# EAGLE board shd_v2.0_double_neu (EAGLE 9.5.2)
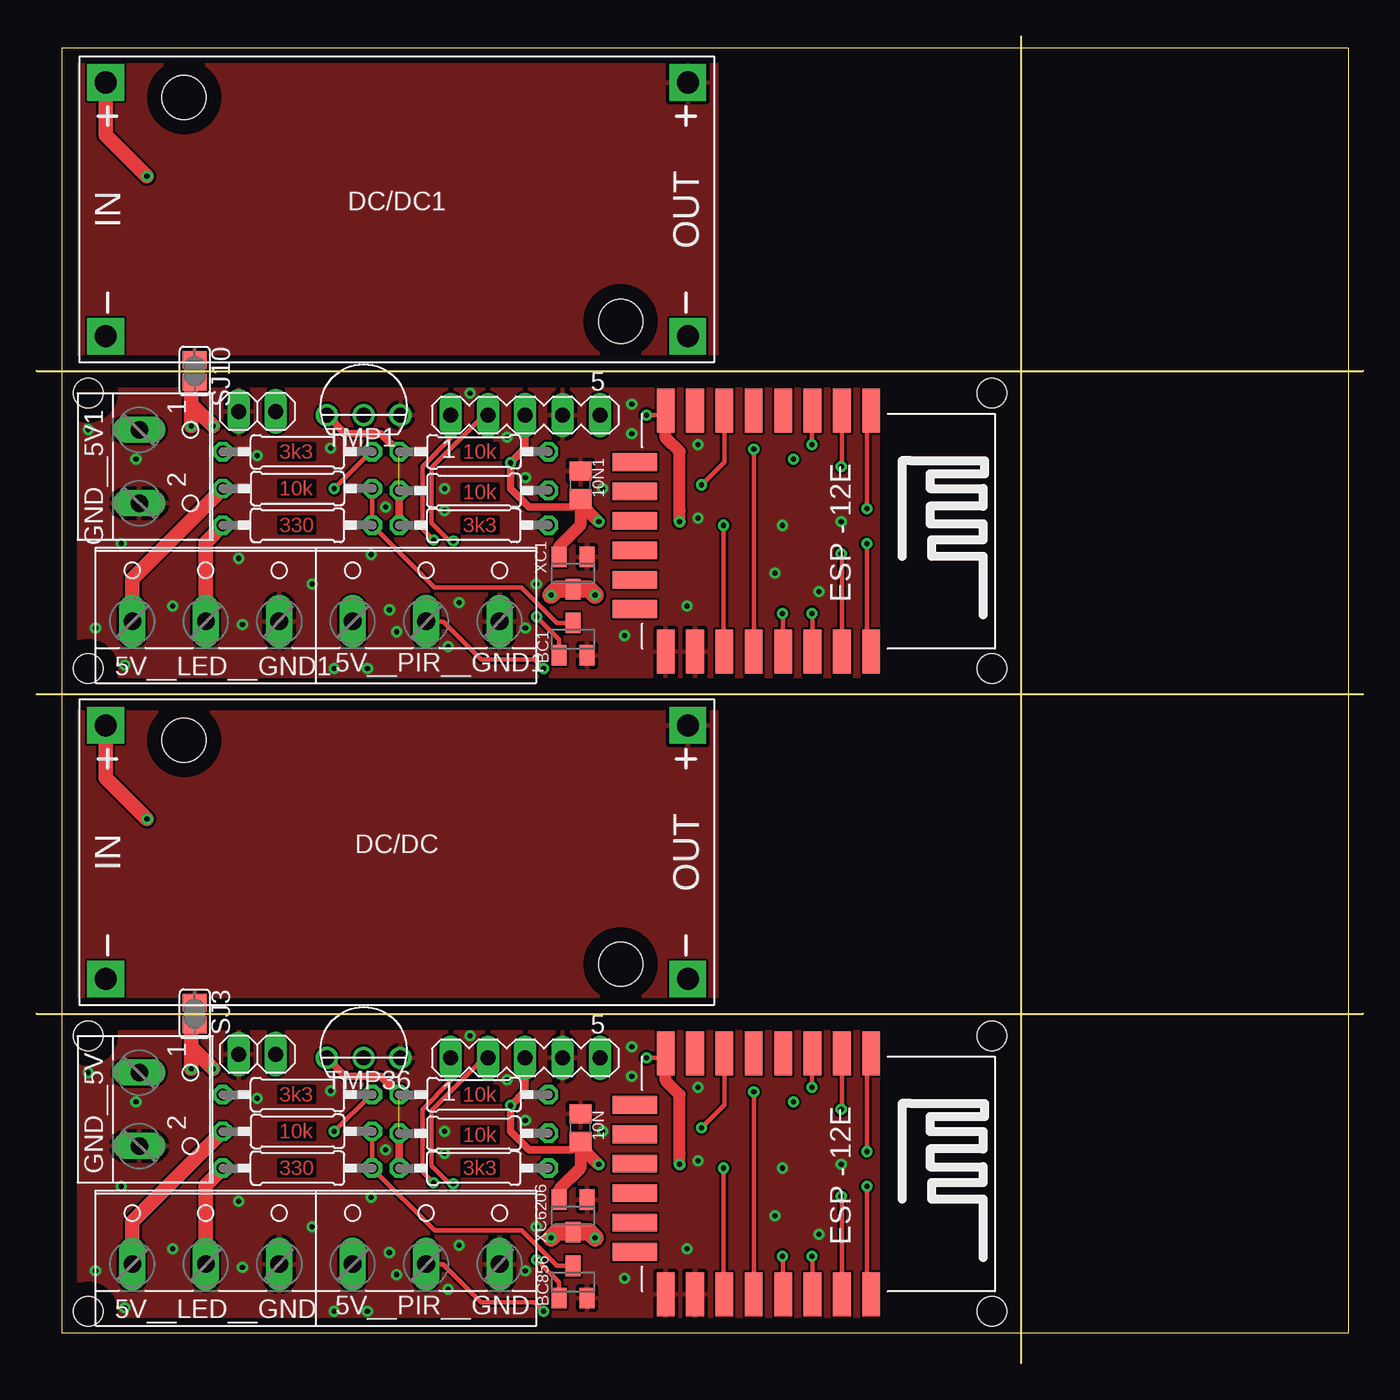
[diagram p0: board, top side]
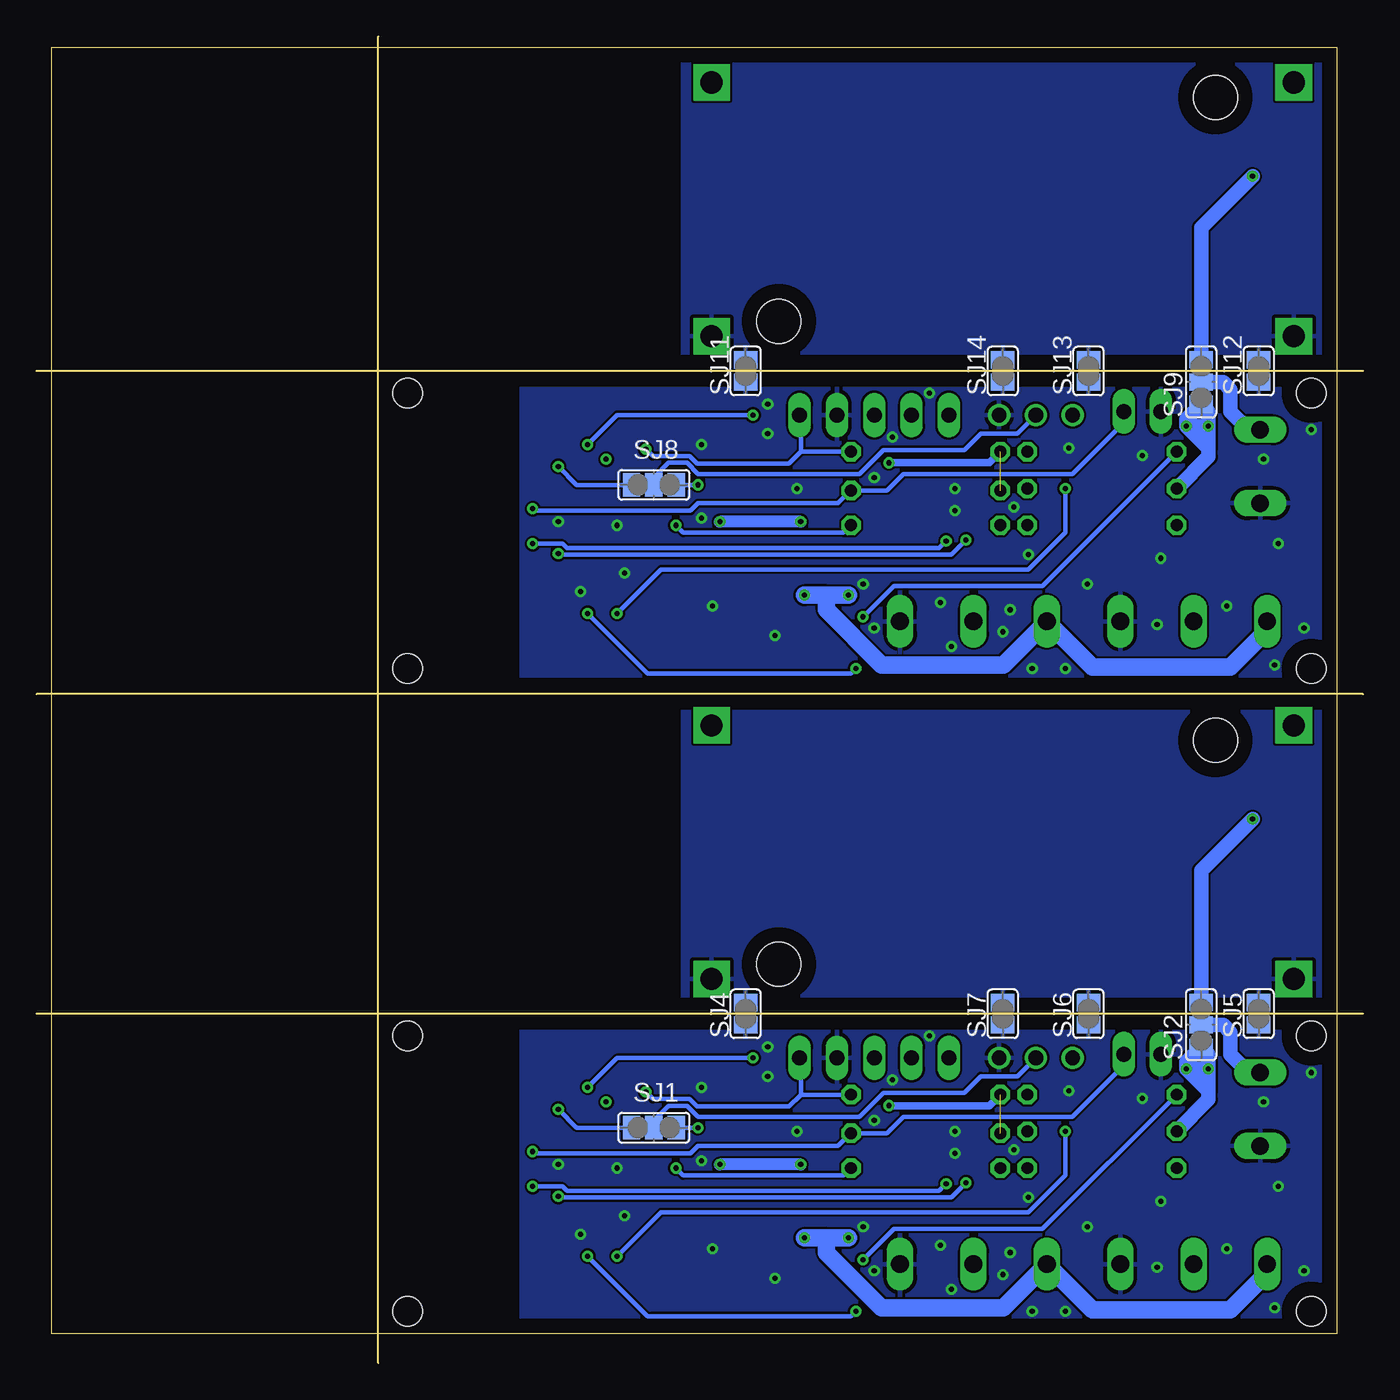
[diagram p1: board, bottom side, seen from below]

Size 90.25 x 90.25 mm. Coordinates in mm from the lower left corner, seen from the top.
Outline: 0,23.75 90.25,23.75
Outline: 0,67.5 90.25,67.5
Outline: 0,45.5 90.25,45.5
Outline: 67,0 67,90.25
Outline: 1.75,2 1.75,89.5 89.25,89.5 89.25,2 1.75,2
Copper layers (1*16): Top 0.035mm / dielectric 1.5mm / Bottom 0.035mm
Design rules "default *": minimum track width 0.3mm, minimum drill 0.35mm, track to track 6mil, track to pad 6mil, pad to pad 6mil, via to via 6mil, smd to smd 6mil, copper to edge 40mil, drill to drill 6mil, minimum pad ring 10mil, minimum via ring 8mil, stop-mask expansion 4mil, vias tented up to drill 0mil, thermal gap 10mil
Holes 2 mm at 3.5,22.25 65,22.25 65,3.5 3.5,3.5 3.5,66 65,66 65,47.25 3.5,47.25

## Footprints (pad centres in the part's own frame; a part is rotated, then mirrored left to right if it is on the bottom)
W237-103 = drill 1.194 long: 1 -5,-1.29; 2 0,-1.29; 3 5,-1.29
C0805 = smd 1.3 x 1.5: 1 -0.95,0; 2 0.95,0
SOT23-BEC = smd 1 x 1.4: B -0.95,-1.1; C 0,1.1; E 0.95,-1.1
DC-DC-STEP-DOWN-LM2596 = drill 1.5 pad 2.5 square: IN+ -19.812,8.636; IN- -19.812,-8.636; OUT+ 19.812,8.636; OUT- 19.812,-8.636 | hole 3: -14.478,7.62; 15.24,-7.62
W237-102 = drill 1.194 long: 1 -2.5,-1.27; 2 2.5,-1.27
1X02 = drill 1.016 long: 1 -1.27,0; 2 1.27,0
MA05-1 = drill 1.016 long: 1 -5.08,0; 2 -2.54,0; 3 0,0; 4 2.54,0; 5 5.08,0
0207/10 = drill 0.813 octagon: 1 -5.08,0; 2 5.08,0
SJ_2 = smd 1.168 x 1.6: 1 -1.524,0; 2 0,0; 3 1.524,0
SJ = smd 1.168 x 1.6: 1 -0.762,0; 2 0.762,0
TO-92 = drill 1: 1 -2.5,0; 2 0,0; 3 2.5,0
ESP12E-SMD = smd 3 x 1.2: ADC -8.3,3.8; CH_PD -8.3,1.8; GND 8.1,-8.2; GPIO0 8.1,-2.2; GPIO2 8.1,-4.2; GPIO4 8.1,-0.2; GPIO5 8.1,1.8; GPIO12 -8.3,-4.2; GPIO13 -8.3,-6.2; GPIO14 -8.3,-2.2; GPIO15 8.1,-6.2; GPIO16 -8.3,-0.2; RESET -8.3,5.8; RXD0 8.1,3.8; TXD0 8.1,5.8; VCC -8.3,-8.2 | smd 1.2 x 3: CS0 -4.8,-10.3; GPIO9 -0.8,-10.3; GPIO10 1.2,-10.3; MISO -2.8,-10.3; MOSI 3.2,-10.3; SCLK 5.2,-10.3
SOT23 = smd 1 x 1.4: 1 -0.95,-1.1; 2 0.95,-1.1; 3 0,1.1

## Placement (x,y rotation side)
5V__LED__GND  [W237-103]  11.5,8 0 top
5V__LED__GND1  [W237-103]  11.5,51.75 0 top
5V__PIR__GND  [W237-103]  26.5,8 0 top
5V__PIR__GND1  [W237-103]  26.5,51.75 0 top
10N  [C0805]  37,16 90 top
10N1  [C0805]  37,59.75 90 top
BC1  [SOT23-BEC]  36.5,49.25 0 top
BC856  [SOT23-BEC]  36.5,5.5 0 top
DC/DC  DC-DC-STEP-DOWN-LM2596  [DC-DC-STEP-DOWN-LM2596]  24.5,34.75 0 top
DC/DC1  DC-DC-STEP-DOWN-LM2596  [DC-DC-STEP-DOWN-LM2596]  24.5,78.5 0 top
GND__5V  [W237-102]  8.25,17.25 270 top
GND__5V1  [W237-102]  8.25,61 270 top
JP1  [1X02]  15,21 0 top
JP2  [1X02]  15,64.75 0 top
PROG_INTERFACE  [MA05-1]  33.25,20.75 0 top
PROG_INTERFACE1  [MA05-1]  33.25,64.5 0 top
R_GPIO1  3k3  [0207/10]  29.75,57 0 top
R_GPIO2  3k3  [0207/10]  29.75,13.25 0 top
R_LED_B  3k3  [0207/10]  17.75,18.25 0 top
R_LED_B1  3k3  [0207/10]  17.75,62 0 top
R_LED_C  10k  [0207/10]  17.75,15.75 180 top
R_LED_C1  330  [0207/10]  17.75,13.25 0 top
R_LED_C2  10k  [0207/10]  17.75,59.5 180 top
R_LED_C3  330  [0207/10]  17.75,57 0 top
R_PROG  10k  [0207/10]  29.75,18.25 180 top
R_PROG1  10k  [0207/10]  29.75,62 180 top
R_RST  10k  [0207/10]  29.75,15.62 180 top
R_RST1  10k  [0207/10]  29.75,59.38 180 top
SJ1  [SJ_2]  48.25,16 0 bottom
SJ2  [SJ_2]  11,23 90 bottom
SJ3  [SJ]  10.75,23.75 270 top
SJ4  [SJ]  42,23.75 90 bottom
SJ5  [SJ]  7.08,23.75 90 bottom
SJ6  [SJ]  18.67,23.75 90 bottom
SJ7  [SJ]  24.5,23.75 90 bottom
SJ8  [SJ_2]  48.25,59.75 0 bottom
SJ9  [SJ_2]  11,66.75 90 bottom
SJ10  [SJ]  10.75,67.5 270 top
SJ11  [SJ]  42,67.5 90 bottom
SJ12  [SJ]  7.08,67.5 90 bottom
SJ13  [SJ]  18.67,67.5 90 bottom
SJ14  [SJ]  24.5,67.5 90 bottom
TMP1  TMP36  [TO-92]  22.25,64.5 0 top
TMP36  TMP36  [TO-92]  22.25,20.75 0 top
U1  [ESP12E-SMD]  51,12.75 270 top
U2  [ESP12E-SMD]  51,56.5 270 top
XC1  [SOT23]  36.5,53.75 180 top
XC6206  [SOT23]  36.5,10 180 top

## Library data of the parts
5V__LED__GND 5V__LED__GND1 5V__PIR__GND 5V__PIR__GND1 = con-wago-500; MPN: 237-103; OC_FARNELL: unknown; OC_NEWARK: 18M7116
10N 10N1 = eagle-ltspice; SPICEMODEL: NONE; SPICEPREFIX: C
BC1 BC856 = transistor
DC/DC DC/DC1 = diy-modules
GND__5V GND__5V1 = con-wago-500; MPN: 237-102; OC_FARNELL: unknown; OC_NEWARK: 70K9898
JP1 JP2 = pinhead
PROG_INTERFACE PROG_INTERFACE1 = con-lstb; OC_FARNELL: unknown; OC_NEWARK: unknown
R_GPIO1 R_GPIO2 R_LED_B R_LED_B1 R_LED_C R_LED_C1-R_LED_C3 R_PROG R_PROG1 R_RST R_RST1 = eagle-ltspice; SPICEMODEL: NONE; SPICEPREFIX: R
SJ1-SJ14 = jumper
TMP1 TMP36 = tmp36
U1 U2 = esp8266modules
XC1 XC6206 = Voltage Regulator

## Nets
GND: 5V__LED__GND.3 5V__PIR__GND.3 10N.2 BC856.E GND__5V.2 JP1.1 PROG_INTERFACE.4 SJ4.1 SJ5.1 SJ6.1 SJ7.1 TMP36.3 U1.GND U1.GPIO15 XC6206.1
GND1: 5V__LED__GND1.3 5V__PIR__GND1.3 10N1.2 BC1.E GND__5V1.2 JP2.1 PROG_INTERFACE1.4 SJ11.1 SJ12.1 SJ13.1 SJ14.1 TMP1.3 U2.GND U2.GPIO15 XC1.1
GND_STEP_DOWN: DC/DC.IN- DC/DC.OUT- SJ4.2 SJ5.2 SJ6.2 SJ7.2
GND_STEP_DOWN1: DC/DC1.IN- DC/DC1.OUT- SJ11.2 SJ12.2 SJ13.2 SJ14.2
GPIO0: PROG_INTERFACE.5 R_PROG.1 U1.GPIO0
GPIO1: PROG_INTERFACE1.5 R_PROG1.1 U2.GPIO0
LED_DATA_3.1: R_LED_B1.2 U2.GPIO4
LED_DATA_3.3: R_LED_B.2 U1.GPIO4
LED_DATA_3.3_R: BC856.B R_LED_B.1
LED_DATA_3.3_R1: BC1.B R_LED_B1.1
LED_DATA_5.0: BC856.C R_LED_C1.2 R_LED_C.1
LED_DATA_5.1: BC1.C R_LED_C2.1 R_LED_C3.2
LED_DATA_OUT: 5V__LED__GND.2 R_LED_C1.1
LED_DATA_OUT1: 5V__LED__GND1.2 R_LED_C3.1
N$1: R_GPIO1.2 U2.GPIO2
N$2: R_GPIO2.2 U1.GPIO2
PIR: 5V__PIR__GND.2 U1.GPIO5
PIR1: 5V__PIR__GND1.2 U2.GPIO5
RST: JP1.2 R_RST.1 U1.RESET
RST1: JP2.2 R_RST1.1 U2.RESET
RX: PROG_INTERFACE.1 U1.RXD0
RX1: PROG_INTERFACE1.1 U2.RXD0
TMP_ANA: SJ1.1 U1.ADC
TMP_ANA1: SJ8.1 U2.ADC
TMP_DATA: SJ1.3 U1.GPIO12
TMP_DATA1: SJ8.3 U2.GPIO12
TX: PROG_INTERFACE.2 U1.TXD0
TX1: PROG_INTERFACE1.2 U2.TXD0
V_IN: GND__5V.1 SJ2.2
V_IN1: GND__5V1.1 SJ9.2
V_IN_1: DC/DC.IN+ SJ2.3
V_IN_2: DC/DC1.IN+ SJ9.3
V_TMP: SJ1.2 TMP36.2
V_TMP1: SJ8.2 TMP1.2
VCC_5.0: 5V__LED__GND.1 5V__PIR__GND.1 R_LED_C.2 SJ2.1 SJ3.2 XC6206.3
VCC_5.1: 5V__LED__GND1.1 5V__PIR__GND1.1 R_LED_C2.2 SJ9.1 SJ10.2 XC1.3
VCC_STEP_DOWN: DC/DC.OUT+ SJ3.1
VCC_STEP_DOWN1: DC/DC1.OUT+ SJ10.1
VDD_3.1: 10N1.1 PROG_INTERFACE1.3 R_GPIO1.1 R_PROG1.2 R_RST1.2 TMP1.1 U2.CH_PD U2.VCC XC1.2
VDD_3.3: 10N.1 PROG_INTERFACE.3 R_GPIO2.1 R_PROG.2 R_RST.2 TMP36.1 U1.CH_PD U1.VCC XC6206.2

## Tracks (layer width: path | path; a pad name or v marks a point on that pad's centre or on a via)
GND  (via drill 0.35)
  other vias: 4,6.25 6,3.75 5.75,12 6.75,17.75 13.75,11 18.75,9.25 24,7.5 24.5,6 28.75,8 28,5 40,5.75 44.25,7.75 50.25,10 53.25,8.75 54.75,13.5 50.75,13.25 40.5,19.5 40.5,21.5 27.75,15.75 15,18 27.75,14.25 22.75,11.25 20,18.5 34,9.25 33.25,16.5 3.5,19.75 32,19.25 33.25,6.25 23.75,14.5 22.5,3.5 20.25,3.5 9.25,7.75 14,6.5 29.5,22.25 45,18.75 45,13.75 38.5,15.75
  pour Top: 1,23.5 1,1 57.25,1 57.25,23.5
  pour Bottom: 1,23.5 1,1 57.25,1 57.25,23.5
GND1  (via drill 0.35)
  other vias: 4,50 6,47.5 5.75,55.75 6.75,61.5 13.75,54.75 18.75,53 24,51.25 24.5,49.75 28.75,51.75 28,48.75 40,49.5 44.25,51.5 50.25,53.75 53.25,52.5 54.75,57.25 50.75,57 40.5,63.25 40.5,65.25 27.75,59.5 15,61.75 27.75,58 22.75,55 20,62.25 34,53 33.25,60.25 3.5,63.5 32,63 33.25,50 23.75,58.25 22.5,47.25 20.25,47.25 9.25,51.5 14,50.25 29.5,66 45,62.5 45,57.5 38.5,59.5
  pour Top: 1,67.25 1,46 57.25,46 57.25,67.25
  pour Bottom: 1,67.25 1,46 57.25,46 57.25,67.25
GND_STEP_DOWN
  pour Bottom: 1,24.25 1,45 46.25,45 46.25,24.25
GND_STEP_DOWN1
  pour Bottom: 1,68 1,89.75 46.25,89.75 46.25,68
GPIO0  (via drill 0.35)
  Top 0.3: U1.GPIO0 v48.8,18.43
  Bottom 0.3: 48.73,18.5 v48.8,18.43 48.32,17.95 45.81,17.95 45.31,17.45 39.05,17.45 38.25,18.25 | 38.25,18.25 38.25,20.67 PROG_INTERFACE.5 | R_PROG.1 38.25,18.25
GPIO1  (via drill 0.35)
  Top 0.3: U2.GPIO0 v48.8,62.18
  Bottom 0.3: 48.73,62.25 v48.8,62.18 48.32,61.7 45.81,61.7 45.31,61.2 39.05,61.2 38.25,62 | 38.25,62 38.25,64.42 PROG_INTERFACE1.5 | R_PROG1.1 38.25,62
LED_DATA_3.1  (via drill 0.35)
  Top 0.3: U2.GPIO4 50.8,50.95 v50.75,51 | R_LED_B1.2 22.75,62 v20.25,59.5
  Bottom 0.3: v20.25,59.5 20.25,56.5 22.75,54 47.75,54 v50.75,51
LED_DATA_3.3  (via drill 0.35)
  Top 0.3: U1.GPIO4 50.8,7.2 v50.75,7.25 | R_LED_B.2 22.75,18.25 v20.25,15.75
  Bottom 0.3: v20.25,15.75 20.25,12.75 22.75,10.25 47.75,10.25 v50.75,7.25
LED_DATA_3.3_R  (via drill 0.35)
  Top 0.3: v34.02,7.02 35.55,5.49 BC856.B
  Bottom 0.3: R_LED_B.1 21.8,9.12 31.91,9.12 v34.02,7.02
LED_DATA_3.3_R1  (via drill 0.35)
  Top 0.3: v34.02,50.77 35.55,49.24 BC1.B
  Bottom 0.3: R_LED_B1.1 21.8,52.88 31.91,52.88 v34.02,50.77
LED_DATA_5.0
  Top 0.3: R_LED_C.1 R_LED_C1.2 27.08,9 33,9 35.4,6.6 BC856.C
LED_DATA_5.1
  Top 0.3: R_LED_C2.1 R_LED_C3.2 27.08,52.75 33,52.75 35.4,50.35 BC1.C
LED_DATA_OUT
  Top 1: R_LED_C1.1 11.5,12.08 5V__LED__GND.2
LED_DATA_OUT1
  Top 1: R_LED_C3.1 11.5,55.83 5V__LED__GND1.2
N$1  (via drill 0.35)
  Top 0.3: U2.GPIO2 46.75,48.45 v46.75,57
  Bottom 0.3: R_GPIO1.2 35.33,56.5 46.25,56.5 v46.75,57
N$2  (via drill 0.35)
  Top 0.3: U1.GPIO2 46.75,4.7 v46.75,13.25
  Bottom 0.3: R_GPIO2.2 35.33,12.75 46.25,12.75 v46.75,13.25
N$3  (via drill 0.35)
  other vias: 51.5,17.75
N$4  (via drill 0.35)
  other vias: 51.5,61.5
PIR  (via drill 0.35)
  Top 0.3: v52.75,7.25 52.8,7.2 U1.GPIO5 | v34.5,3.5 33.9,4.11 30.25,4.11 27.64,6.71 5V__PIR__GND.2
  Bottom 0.3: v34.5,3.5 34.83,3.17 48.67,3.17 v52.75,7.25
PIR1  (via drill 0.35)
  Top 0.3: v52.75,51 52.8,50.95 U2.GPIO5 | v34.5,47.25 33.9,47.85 30.25,47.85 27.64,50.46 5V__PIR__GND1.2
  Bottom 0.3: v34.5,47.25 34.83,46.92 48.67,46.92 v52.75,51
RST  (via drill 0.35)
  Top 0.3: U1.RESET 56.5,20.75 v56.5,14.38
  Bottom 0.3: JP1.2 16.27,20.23 19.75,16.75 31.25,16.75 32.38,15.62 R_RST.1 35.7,14.75 45.25,14.75 45.75,14.25 56.38,14.25 v56.5,14.38
RST1  (via drill 0.35)
  Top 0.3: U2.RESET 56.5,64.5 v56.5,58.12
  Bottom 0.3: JP2.2 16.27,63.98 19.75,60.5 31.25,60.5 32.38,59.38 R_RST1.1 35.7,58.5 45.25,58.5 45.75,58 56.38,58 v56.5,58.12
RX  (via drill 0.35)
  Top 0.3: U1.RXD0 54.8,11.27 v54.75,11.32 | PROG_INTERFACE.1 28.17,19.17 26.25,17.25 26.25,13 v27,12.25
  Bottom 0.3: v54.75,11.32 54.68,11.25 28,11.25 v27,12.25
RX1  (via drill 0.35)
  Top 0.3: U2.RXD0 54.8,55.02 v54.75,55.07 | PROG_INTERFACE1.1 28.17,62.92 26.25,61 26.25,56.75 v27,56
  Bottom 0.3: v54.75,55.07 54.68,55 28,55 v27,56
TMP_ANA  (via drill 0.35)
  Top 0.3: U1.ADC 54.8,17.3 v54.75,17.25
  Bottom 0.3: SJ1.1 53.5,16 v54.75,17.25
TMP_ANA1  (via drill 0.35)
  Top 0.3: U2.ADC 54.8,61.05 v54.75,61
  Bottom 0.3: SJ8.1 53.5,59.75 v54.75,61
TMP_DATA  (via drill 0.35)
  Top 0.3: v45.25,16 46.8,17.55 U1.GPIO12
  Bottom 0.3: SJ1.3 v45.25,16
TMP_DATA1  (via drill 0.35)
  Top 0.3: v45.25,59.75 46.8,61.3 U2.GPIO12
  Bottom 0.3: SJ8.3 v45.25,59.75
TX  (via drill 0.35)
  Top 0.3: v28.35,12.19 28.1,12.19 26.87,13.41 26.87,17.19 30.44,20.75 PROG_INTERFACE.2 | U1.TXD0 56.5,4.95 v56.5,12
  Bottom 0.3: v28.35,12.19 28.83,11.7 54.17,11.7 54.47,12 v56.5,12
TX1  (via drill 0.35)
  Top 0.3: v28.35,55.94 28.1,55.94 26.87,57.16 26.87,60.94 30.44,64.5 PROG_INTERFACE1.2 | U2.TXD0 56.5,48.7 v56.5,55.75
  Bottom 0.3: v28.35,55.94 28.83,55.45 54.17,55.45 54.47,55.75 v56.5,55.75
V_IN
  Bottom 1: GND__5V.1 7.75,19.75 9,21 9,22.5 9.5,23 SJ2.2
V_IN1
  Bottom 1: GND__5V1.1 7.75,63.5 9,64.75 9,66.25 9.5,66.75 SJ9.2
V_IN_1  (via drill 0.35)
  Top 1: v7.5,37 4.69,39.81 DC/DC.IN+
  Bottom 1: SJ2.3 11,33.5 v7.5,37
V_IN_2  (via drill 0.35)
  Top 1: v7.5,80.75 4.69,83.56 DC/DC1.IN+
  Bottom 1: SJ9.3 11,77.25 v7.5,80.75
V_TMP
  Bottom 0.3: TMP36.2 23.5,19.5 26,19.5 27.12,18.38 32.62,18.38 34.25,16.75 45.25,16.75 46,17.5 47.25,17.5 48.25,16.5 SJ1.2
V_TMP1
  Bottom 0.3: TMP1.2 23.5,63.25 26,63.25 27.12,62.12 32.62,62.12 34.25,60.5 45.25,60.5 46,61.25 47.25,61.25 48.25,60.25 SJ8.2
VCC_5.0  (via drill 0.35)
  Top 1: SJ3.2 10.5,22.74 10.5,21.5 | 10.5,21.5 v10.5,20 | v12,20 10.5,21.5 | R_LED_C.2 6.5,9.58 5V__LED__GND.1
  Top 1.2: v38,8.5 37.6,8.9 XC6206.3 35.4,8.9 v35,8.5
  Bottom 1: v12,20 12,20.48 SJ2.1 10.5,20.98 v10.5,20 | v10.5,20 10.5,18.5 | v10.5,20 v12,20 | v12,20 10.5,18.5 | R_LED_C.2 10.5,17.92 10.5,18.5
  Bottom 1.2: 36.5,8.5 v38,8.5 | 36.5,8.5 v35,8.5 | 36.5,8.5 36.5,7.5 32.75,3.75 24.46,3.75 5V__PIR__GND.1 18.41,3.62 9,3.62 6.5,6.12 5V__LED__GND.1
VCC_5.1  (via drill 0.35)
  Top 1: SJ10.2 10.5,66.49 10.5,65.25 | 10.5,65.25 v10.5,63.75 | v12,63.75 10.5,65.25 | R_LED_C2.2 6.5,53.33 5V__LED__GND1.1
  Top 1.2: v38,52.25 37.6,52.65 XC1.3 35.4,52.65 v35,52.25
  Bottom 1: v12,63.75 12,64.23 SJ9.1 10.5,64.73 v10.5,63.75 | v10.5,63.75 10.5,62.25 | v10.5,63.75 v12,63.75 | v12,63.75 10.5,62.25 | R_LED_C2.2 10.5,61.67 10.5,62.25
  Bottom 1.2: 36.5,52.25 v38,52.25 | 36.5,52.25 v35,52.25 | 36.5,52.25 36.5,51.25 32.75,47.5 24.46,47.5 5V__PIR__GND1.1 18.41,47.37 9,47.37 6.5,49.87 5V__LED__GND1.1
VCC_STEP_DOWN
  pour Top: 1,24.25 1,45 46.25,45 46.25,24.25
VCC_STEP_DOWN1
  pour Top: 1,68 1,89.75 46,89.75 46.25,89.5 46.25,68
VDD_3.1  (via drill 0.35)  (1 unrouted)
  Top 0.3: v52.75,62.5 52.75,64.75 U2.CH_PD | U2.VCC 42.5,64.5 v41.5,64.5
  Top 0.5: R_PROG1.2 23.42,63.25 21,63.25 TMP1.1 | 10N1.1 36.45,58.25 33.5,58.25 32.25,59.5 v32.25,61.25 33.25,62.25 PROG_INTERFACE1.3 | R_RST1.2 R_GPIO1.1
  Top 0.8: XC1.2 35.55,55.55 37,57 10N1.1 37,58.5 v38.25,57.25 | v43.75,57.25 43.75,58 43.75,62 42.8,62.95 U2.VCC
  Bottom 0.3: v41.5,64.5 50.75,64.5 v52.75,62.5
  Bottom 0.5: R_PROG1.2 25.42,61.25 v32.25,61.25
  Bottom 0.8: v38.25,57.25 v43.75,57.25
VDD_3.3  (via drill 0.35)  (1 unrouted)
  Top 0.3: v52.75,18.75 52.75,21 U1.CH_PD | U1.VCC 42.5,20.75 v41.5,20.75
  Top 0.5: R_PROG.2 23.42,19.5 21,19.5 TMP36.1 | 10N.1 36.45,14.5 33.5,14.5 32.25,15.75 v32.25,17.5 33.25,18.5 PROG_INTERFACE.3 | R_RST.2 R_GPIO2.1
  Top 0.8: XC6206.2 35.55,11.8 37,13.25 10N.1 37,14.75 v38.25,13.5 | v43.75,13.5 43.75,14.25 43.75,18.25 42.8,19.2 U1.VCC
  Bottom 0.3: v41.5,20.75 50.75,20.75 v52.75,18.75
  Bottom 0.5: R_PROG.2 25.42,17.5 v32.25,17.5
  Bottom 0.8: v38.25,13.5 v43.75,13.5

## Text on the board
Top: 3k3 | 10k | 10k | 10k | 330 | 3k3 | 3k3 | 10k | 10k | 10k | 330 | 3k3